# Altium PCB PCB1.PcbDoc
Units mm, origin at the board's own origin, x right, y up, seen from the top; angles counter-clockwise.
Board outline 84.5 x 47.9 mm, 2 copper layers (Top Layer, Bottom Layer); 41 components, 29 nets, 133 pads, 0 vias.
Unrouted connection lines stored in the file: 7.
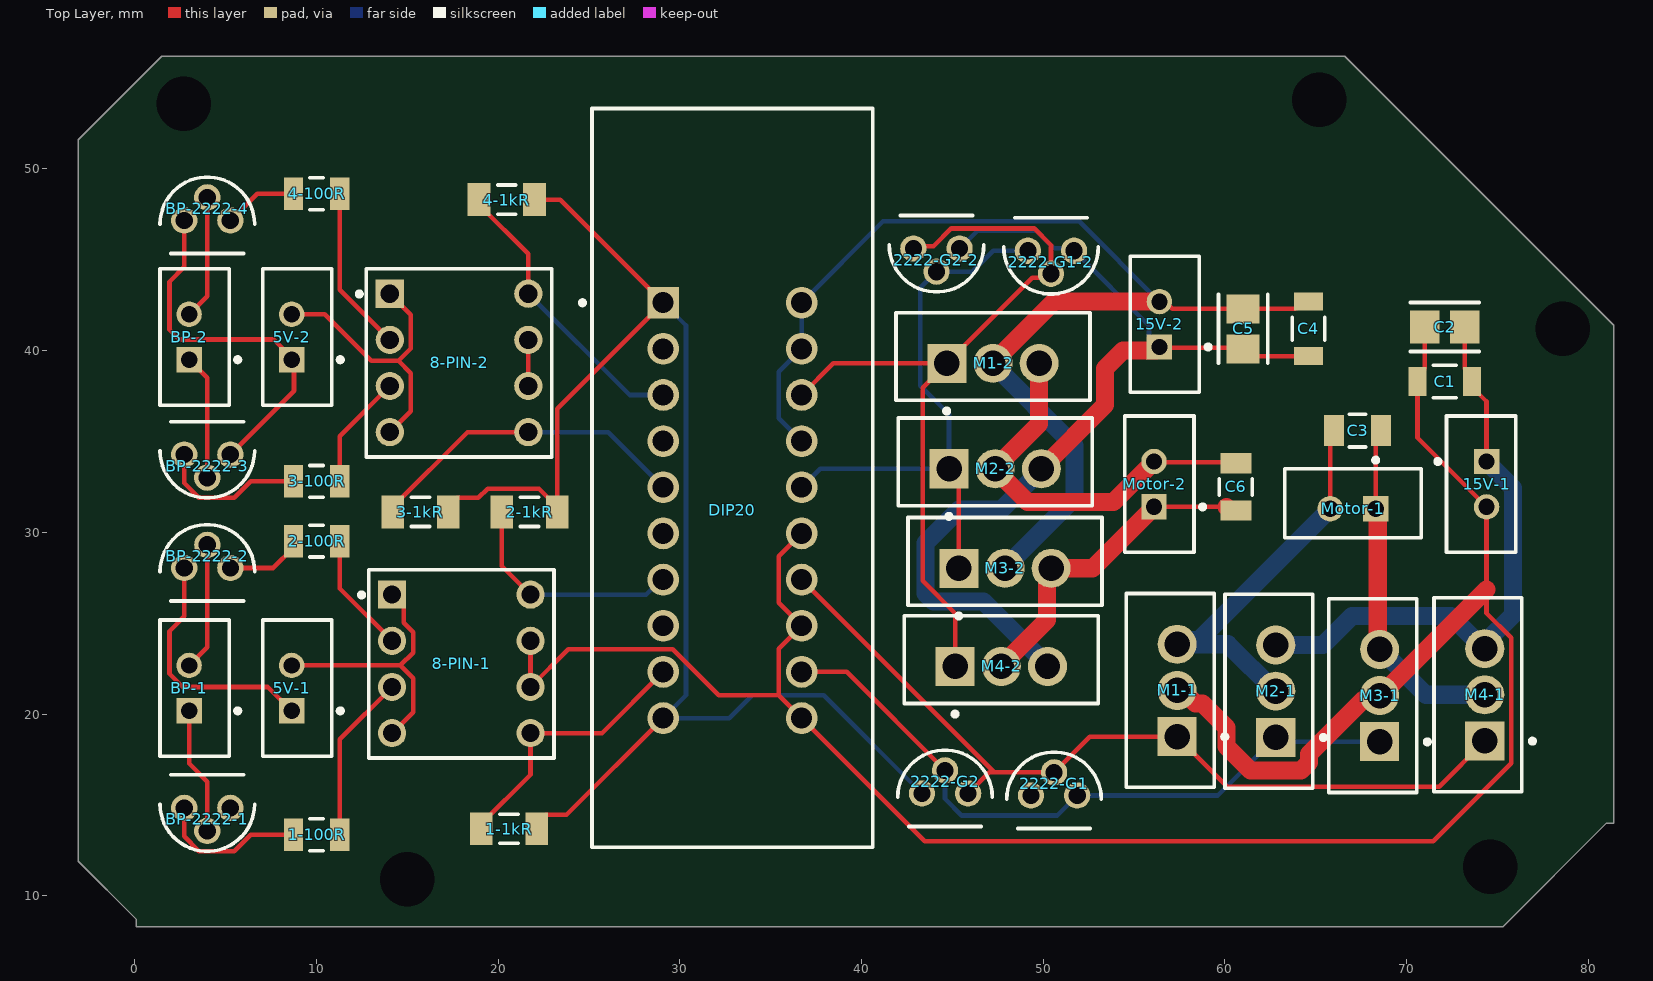
[diagram p0: Top Layer view]
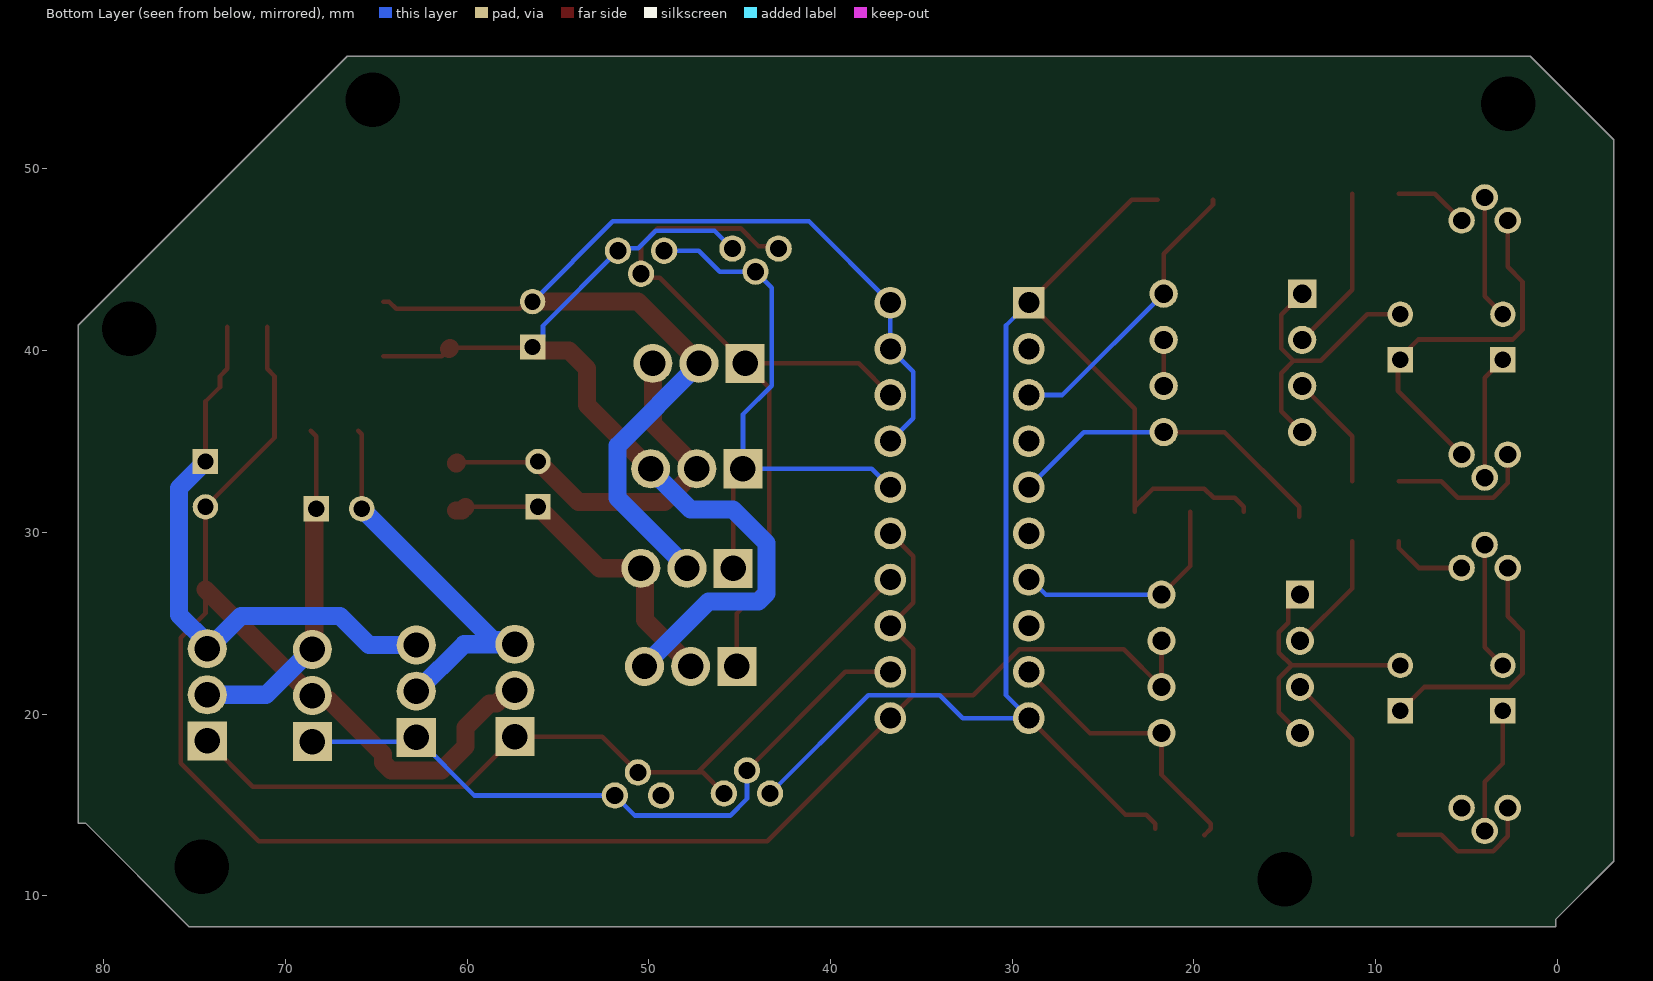
[diagram p1: Bottom Layer view, seen from below]
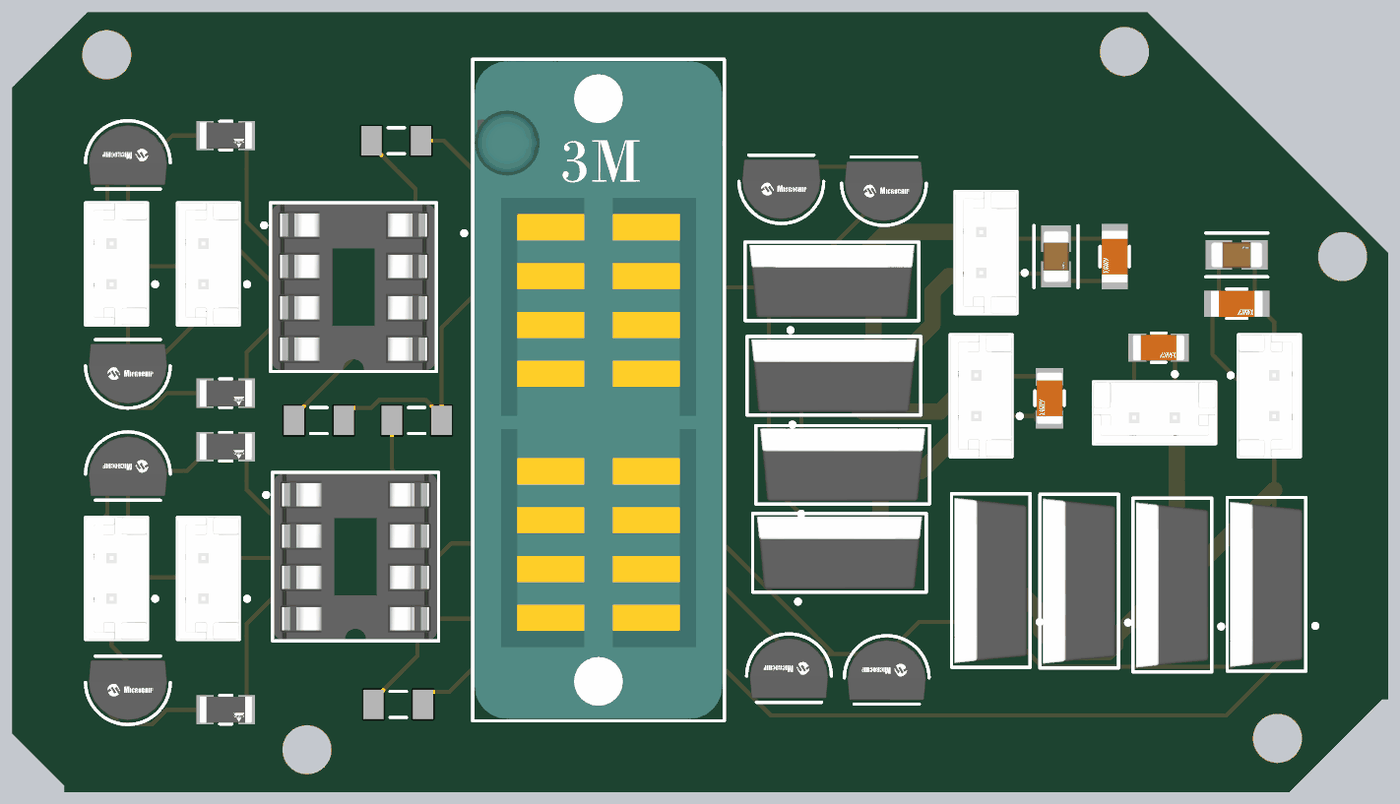
[diagram p2: 3D render of the assembled board from above, using the file's embedded part models]

## Layer stack, top to bottom
Top Solder: solder mask 0.0102, Solder Resist, Dk 3.5
Top Layer: signal copper 0.0356
Dielectric 1: dielectric 0.32, FR-4, Dk 4.8
Bottom Layer: signal copper 0.0356
Bottom Solder: solder mask 0.0102, Solder Resist, Dk 3.5

## Board outline
1.5,56.2 -3.1,51.6 -3.1,11.9 0.1,8.7 0.1,8.3 75.3,8.3 81,14 81.4,14 81.4,41.4 66.6,56.2 65.6,56.2

## Design rules (kind name [scope] priority, off if disabled: settings)
Clearance [All] p1: gap=0.254 ignorepadtopadclearanceinfootprint=FALSE except(0: Arc-Hole Track-Hole SMDPad-Hole THPad-Hole Via-Hole Fill-Hole Poly-Hole Region-Hole Text-Hole)
PolygonConnect [All] p1: connectstyle=Relief reliefconductorwidth=0.254 reliefentries=4 polygonreliefangle="90 Angle" airgapwidth=0.254
RoutingVias [All] p1: holewidth=0.711 width=1.27 viastyle="Through Hole" minholewidth=0.711 minwidth=1.27 maxholewidth=0.711 maxwidth=1.27
SolderMaskExpansion [All] p1: expansion=0.102 istentingtop=FALSE
Width [All] p1: maxlimit=1 minlimit=0.254 preferedwidth=0.254
30 further rules are at their usual default settings.

## Components (designator, comment, footprint, x,y, rotation, side; value= is the part's Value field where it differs from the comment)
1-1kR "1k" RESC3116X65X40ML10T20 20.604,13.686 r180 top
1-100R "100" FP-CRCW1206-e3-MFG 10.014,13.361 r0 top
2-1kR "1k" RESC3116X65X40ML10T20 21.736,31.125 r0 top
2-100R "100" FP-CRCW1206-e3-MFG 10.014,29.516 r0 top
3-1kR "1k" RESC3116X65X40ML10T20 15.73,31.125 r180 top
3-100R "100" FP-CRCW1206-e3-MFG 10.014,32.804 r0 top
4-1kR "1k" RESC3116X65X40ML10T20 20.481,48.313 r0 top
4-100R "100" FP-CRCW1206-e3-MFG 10.014,48.638 r0 top
5V-1 "" FP-B2B-EH-A_LF_SN-MFG 8.944,21.426 r90 top
5V-2 "" FP-B2B-EH-A_LF_SN-MFG 8.944,40.75 r90 top
8-PIN-1 "8-pin IC 1" FP-1-2199298-2-MFG 17.979,22.761 r270 top
8-PIN-2 "8-pin IC 1" FP-1-2199298-2-MFG 17.856,39.324 r270 top
15V-1 "15V-1" FP-B2B-EH-A_LF_SN-MFG 74.1,32.65 r270 top
15V-2 "15V-2" FP-B2B-EH-A_LF_SN-MFG 56.7,41.45 r90 top
2222-G1 "VN2222LL-G" FP-VN2222LL-G-MFG 50.6,15.8 r180 top
2222-G1-2 "VN2222LL-G" FP-VN2222LL-G-MFG 50.43,45.221 r0 top
2222-G2 "VN2222LL-G" FP-VN2222LL-G-MFG 44.6,15.909 r180 top
2222-G2-2 "VN2222LL-G" FP-VN2222LL-G-MFG 44.13,45.339 r0 top
BP-1 "" FP-B2B-EH-A_LF_SN-MFG 3.3,21.426 r90 top
BP-2 "" FP-B2B-EH-A_LF_SN-MFG 3.3,40.75 r90 top
BP-2222-1 "VN2222LL-G" FP-VN2222LL-G-MFG 4,14.556 r0 top
BP-2222-2 "VN2222LL-G" FP-VN2222LL-G-MFG 4.003,28.321 r180 top
BP-2222-3 "VN2222LL-G" FP-VN2222LL-G-MFG 4,34 r0 top
BP-2222-4 "VN2222LL-G" FP-VN2222LL-G-MFG 4,47.442 r180 top
C1 "100pF" FP-1206-L_3_2_0_2-W_1_6_0-MFG 72.1,38.3 r0 top
C2 "100uF" FP-C3216-160-0_3-IPC_C 72.099,41.3 r0 top
C3 "100nF" FP-1206-L_3_2_0_2-W_1_6_0-IPC_C 67.301,35.6 r0 top
C4 "100pF" FP-1206-L_3_2_0_2-W_1_6_0-MFG 64.6,41.2 r270 top
C5 "100uF" FP-C3216-160-0_3-IPC_C 61,41.2 r270 top
C6 "100nF" FP-1206-L_3_2_0_2-W_1_6_0-IPC_C 60.6,32.5 r270 top
DIP20 "220-3342-00-0602J" FP-220-3342-00-0602J-0 32.9,33 r90 top
M1-1 "IRFZ44ZLPBF" FP-PG-TO262-3-MFG 56.995,21.3 r180 top
M1-2 "IRFZ44ZLPBF" FP-PG-TO262-3-MFG 47.24,39.678 r90 top
M2-1 "IRFZ44ZLPBF" FP-PG-TO262-3-MFG 62.423,21.26 r180 top
M2-2 "IRFZ44ZLPBF" FP-PG-TO262-3-MFG 47.36,33.877 r90 top
M3-1 "IRFZ44ZLPBF" FP-PG-TO262-3-MFG 68.141,21.019 r180 top
M3-2 "IRFZ44ZLPBF" FP-PG-TO262-3-MFG 47.9,28.4 r90 top
M4-1 "IRFZ44ZLPBF" FP-PG-TO262-3-MFG 73.923,21.06 r180 top
M4-2 "IRFZ44ZLPBF" FP-PG-TO262-3-MFG 47.7,23 r90 top
Motor-1 "header thing" FP-B2B-EH-A_LF_SN-MFG 67.05,31.6 r180 top
Motor-2 "header thing" FP-B2B-EH-A_LF_SN-MFG 56.4,32.65 r90 top

## Footprints (in the part's own frame and the unit in brackets; to place one, negate y for a bottom-side part, rotate by r counter-clockwise, add the part's x,y. Pads: shape width x height; smd on the part's side, far side on the other; paste and mask are expansions set on the pad)
FP-1-2199298-2-MFG [mm]
  rect 1.55x1.55 hole 1 paste-1000 mask+0: 1(-3.81,-3.81)
  round 1.55 hole 1 paste-1000 mask+0: 2(-1.27,-3.81) 3(1.27,-3.81) 4(3.81,-3.81) 5(3.81,3.81) 6(1.27,3.81) 7(-1.27,3.81) 8(-3.81,3.81)
  silkscreen extent -5.18,-5.61 5.18,5.1, body extent -5.28,-5.2 5.28,5.2, height 0.25
FP-220-3342-00-0602J-0 [mm]
  rect 1.75x1.75 hole 1.15 paste-1000 mask+0: 1(9.64,3.81)
  round 1.75 hole 1.15 paste-1000 mask+0: 2(7.1,3.81) 3(4.56,3.81) 4(2.02,3.81) 5(-0.52,3.81) 6(-3.06,3.81) 7(-5.6,3.81) 8(-8.14,3.81) 9(-10.68,3.81) 10(-13.22,3.81) 11(-13.22,-3.81) 12(-10.68,-3.81) 13(-8.14,-3.81) 14(-5.6,-3.81) 15(-3.06,-3.81) 16(-0.52,-3.81) 17(2.02,-3.81) 18(4.56,-3.81) 19(7.1,-3.81) 20(9.64,-3.81)
  silkscreen extent -20.33,-7.73 20.33,8.37, body extent -20.43,-7.83 32.97,7.83, height 0.25
FP-1206-L_3_2_0_2-W_1_6_0-IPC_C [mm]
  rect 1.105x1.706 smd paste+0 mask+0: 1(-1.301,0) 2(1.301,0)
  silkscreen extent -0.45,-0.9 0.45,0.9, body extent -1.95,-1 1.95,1, height 0.25
FP-1206-L_3_2_0_2-W_1_6_0-MFG [mm]
  rect 1x1.6 smd paste+0 mask+0: 1(-1.5,0) 2(1.5,0)
  silkscreen extent -0.63,-0.9 0.63,0.9, body extent -2.1,-1 2.1,1, height 0.25
FP-B2B-EH-A_LF_SN-MFG [mm]
  rect 1.4x1.4 hole 0.9 paste-1000 mask+0: 1(-1.25,0.3)
  round 1.4 hole 0.9 paste-1000 mask+0: 2(1.25,0.3)
  silkscreen extent -3.75,-2.5 3.75,1.9, body extent -3.85,-2 3.85,2, height 0.25
FP-C3216-160-0_3-IPC_C [mm]
  rect 1.604x1.806 smd paste+0 mask+0: 1(-1.101,0) 2(1.101,0)
  silkscreen extent -1.9,-1.35 1.9,1.35, body extent -2,-1.05 2,1.05, height 0.25
FP-CRCW1206-e3-MFG [mm]
  rect 1.05x1.8 smd paste+0 mask+0: 1(-1.275,0) 2(1.275,0)
  silkscreen extent -0.38,-0.87 0.38,0.87, body extent -1.9,-1 1.9,1, height 0.25
FP-PG-TO262-3-MFG [mm]
  rect 2.15x2.15 hole 1.4 paste-1000 mask+0: 1(-0.377,2.54)
  round 2.15 hole 1.4 paste-1000 mask+0: 2(-0.377,0) 3(-0.377,-2.54)
  silkscreen extent -3.13,-5.34 2.41,5.34, body extent -2.51,-5.44 2.51,5.44, height 0.25
FP-VN2222LL-G-MFG [mm]
  round 1.45 hole 0.95 paste-1000 mask+0: 1(1.27,0.279) 2(0,-0.991) 3(-1.27,0.279)
  silkscreen extent -2.6,-2.1 2.6,2.1, body extent -2.7,-2.2 2.7,2.2, height 0.25
RESC3116X65X40ML10T20 [mm] "Chip Resistor, 2-Leads, Body 3.10x1.60mm, IPC Low Density"
  rect 1.25x1.8 smd: 1(-1.525,0) 2(1.525,0)
  silkscreen extent -0.5,-0.8 0.5,0.8, body extent -1.6,-0.85 1.6,0.85, height 0.65

## Part data
1-1kR 2-1kR 3-1kR 4-1kR: library part CMP-2100-03678-1, "Chip Resistor, 1 KOhm, +/- 1%, 0.25 W, -55 to 155 degC, 1206 (3216 Metric), RoHS, Tape and Reel", Case Code (Imperial)=1206, Case Code (Metric)=3216, Manufacturer=Yageo, Max Operating Temperature=155degC, Min Operating Temperature=-55degC, Package Description="2-Pin Surface Mount Device, Body 3.1 x 1.6 mm", Package Reference=1206.0, Power Rating=250mW, Resistance=1KOhm, Temperature Coefficient=100ppm/degreesC, Tolerance=1%, Voltage Rating=200V, Case/Package=1206, Composition=ThickFilm, Datasheet URL=http://www.yageo.com/NewPortal/yageodocoutput?fileName=/pdf/R-Chip/PYu-RC_Group_51_RoHS_L_5.pdf, Datasheet Version="Rev. 5, 10/2016", Depth=1.6mm, Height=0.55mm, Lead Free=LeadFree, Length=3.1mm, Manufacturer URL=http://www.yageo.com/, Military Standard=Not, Packaging=TapeandReel, REACH SVHC=Unknown, RoHSCompliant=true, Termination=SMD/SMT
1-100R 2-100R 3-100R 4-100R: library part CMP-2003-04801-2, "RES Thick Film, 100Ω, 1%, 0.25W, 100ppm/°C, 1206", Case Code (Imperial)=1206, Case Code (Metric)=3216, Max Operating Temperature=155°C, Min Operating Temperature=-55°C, Package Quantity=5000, Power Rating=250mW, Resistance=100R, Temperature Coefficient=100ppm/°C, Tolerance=1%, Voltage Rating=200V, Case/Package=1206, Composition="Thick Film", Contact Plating=Tin, Depth=1.6mm, Height=0.55mm, Lead Free="Lead Free", Length=3.2mm, Military Standard=Not, Mount="Surface Mount", Number of Pins=2, Packaging="Tape and Reel", Radiation Hardening=No, Termination=SMD/SMT, Voltage Rating (DC)=200V, Weight=0.000353oz, Width=1.6mm
5V-1 5V-2 15V-1 15V-2 BP-1 BP-2 Motor-1 Motor-2: library part CMP-17439-000026-1, "CONN HEADER VERT 2POS 2.5MM", Color=Natural, Contact Resistance=20mR, Current Rating=3A, Housing Color=White, Max Operating Temperature=85°C, Max Voltage Rating (AC)=250V, Min Operating Temperature=-25°C, Connector Type=Plug, Contact Material="Copper Alloy", Contact Mating Length=0.13inch, Contact Plating=Tin, Contact Type="Male Pin", Depth=3.8mm, Fastening Type=Detent, Gender=Male, Housing Material=Nylon, Lead Free="Lead Free", Length=7.5mm, Max Current Rating=3A, Mount="Through Hole", Number of Contacts=2, Number of Positions=2, Number of Rows=1, Orientation=Straight, Packaging=Bulk, Pitch=2.5mm, Series=EH, Termination=Press-Fit, Voltage Rating=250V
8-PIN-1 8-PIN-2: library part CMP-03370-000009-1, "CONN IC DIP SOCKET 8POS TIN", Color=Black, Contact Current Rating=1A, Contact Resistance=20mR, Flammability Rating="UL94 V-0", Insulation Resistance=1GR, Max Operating Temperature=105°C, Min Operating Temperature=-40°C, Package Quantity=60, Connector Type=Pin, Contact Finish - Mating=TIN, Contact Material=Bronze, Contact Plating=Tin, Contact Post Length=3inch, ELV=Compliant, Housing Material=PBT, Lead Free="Lead Free", Lead Pitch=2.54mm, Length=0.4inch, Mating Alignment="Yes (With)", Mount="Through Hole", Number of Contacts=8, Number of Positions=8, Number of Rows=2, Orientation=Straight, Packaging=Rail/Tube, Pitch=2.54mm, Radiation Hardening=No, RoHS Compliant=Yes, Row Spacing=0.3inch, Series="Diplomate DL", Termination="Through Hole"
2222-G1 2222-G1-2 2222-G2 2222-G2-2 BP-2222-1 BP-2222-2 BP-2222-3 BP-2222-4: library part CMP-06369-000005-1, "MOSFET N-CH 60V 0.23A TO92-3", Case/Package=TO-92, Continuous Drain Current (ID)=230mA, Drain to Source Breakdown Voltage=60V, Drain to Source Resistance=7.5R, Gate to Source Voltage (Vgs)=30V, Max Operating Temperature=150°C, Min Operating Temperature=-55°C, Package Quantity=1000, Power Dissipation=1W, Element Configuration=Single, Lead Free="Lead Free", Mount="Through Hole", Number of Elements=1, Number of Pins=3, Packaging=Bulk, Radiation Hardening=No
C1 C4: library part CMP-04427-007664-1, "General Purpose Ceramic Capacitor, 1206, 100pF, 5%, NP0, 30ppm/°C, 100V", Case Code (Imperial)=1206, Case Code (Metric)=3216, Dielectric=C0G, Insulation Resistance=100GR, Max Operating Temperature=125°C, Min Operating Temperature=-55°C, Package Quantity=1, Temperature Coefficient=30ppm/°C, Tolerance=5%, Voltage=63V, Voltage Rating=100V, Capacitance=100pF, Case/Package=1206, Construction=Flat, Contact Plating=Tin, Depth=1.6mm, Height=0.94mm, Lead Free="Lead Free", Length=3.2mm, Mount="Surface Mount", Number of Pins=2, Packaging="Tape and Reel", Radiation Hardening=No, REACH SVHC="No SVHC", RoHS Compliant=Yes, Series=-, Termination=SMD/SMT, Thickness=0.037inch, Voltage Rating (DC)=100V, Width=0.063inch
C2 C5: library part CMP-2000-05396-3, "Multilayer Ceramic Capacitors 100uF ±20% 10V X5R SMD 1206", Case Code (Imperial)=1206, Case Code (Metric)=3216, Dielectric=X5R, Dielectric Material=Ceramic, Max Operating Temperature=85°C, Min Operating Temperature=-55°C, Package Quantity=1, Tolerance=20%, Voltage=10V, Capacitance=100uF, Case/Package=1206, Construction=Flat, Depth=1.6mm, Height=1.6mm, Lead Free="Lead Free", Length=3.2mm, Mount="Surface Mount", Packaging="Tape and Reel", Radiation Hardening=No, REACH SVHC="No SVHC", Resistor Type=Ceramic, RoHS Compliant=Yes, Series=C, Termination=SMD/SMT, Thickness=0.075inch, Voltage Rating=10V, Voltage Rating (DC)=10V, Weight=0.000571oz, Width=1.6mm
C3 C6: library part CMP-04427-013576-1, "General Purpose Ceramic Capacitor, 1206, 100nF, 5%, X7R, 15%, 100V", Case Code (Imperial)=1206, Case Code (Metric)=3216, Dielectric=X7R, Dielectric Material=Ceramic, Max Operating Temperature=125°C, Min Operating Temperature=-55°C, Package Quantity=1, Tolerance=5%, Voltage=100V, Capacitance=100nF, Case/Package=1206, Construction=Flat, Contact Plating=Tin, Depth=1.6mm, Height=1.27mm, Lead Free="Lead Free", Length=3.2mm, Mount="Surface Mount", Number of Pins=2, Packaging="Tape and Reel", Radiation Hardening=No, REACH SVHC="No SVHC", RoHS Compliant=Yes, Series=-, Termination=SMD/SMT, Thickness=0.05inch, Voltage Rating=100V, Voltage Rating (DC)=100V, Width=0.063inch
DIP20: library part CMP-05380-000001-1, "CONN IC DIP SOCKET ZIF 20POS GLD", Current Rating=1A, Manufacturer=3M, Package=0, Socket Package=DIP20, Temperature="-55°C to +125°C", Temperature Range High=+125°C, Temperature Range Low=-55°C, Automotive=No, Category=Conn, ComponentLink2Description=Datasheet, ComponentLink2URL=https://multimedia.3m.com/mws/media/494546O/3mtm-dip-sockets-100-2-54-mm-ts0365.pdf, Conn Gender=Female, Conn Orientation=Vertical, Contact Material=Gold,Nickel, Device Class L1=Connectors, Device Class L2="IC and Component Sockets", Device Class L3=unset, Digikey Description="CONN IC DIP SOCKET ZIF 20POS GLD", Height=24mm, Is Female=yes, Lead Free=Yes, Manufacturer Part Number=220-3342-00-0602J, Mouser Description="IC & Component Sockets 0.100 DIP SOCKET 20 Contact Qty.", Number of Contacts=20, Number of Rows=2, Octopart=https://octopart.com/220-3342-00-0602j-3m-108647, Pitch=2.54mm, RoHS=TRUE, Standoff Height=0.38mm
M1-1 M1-2 M2-1 M2-2 M3-1 M3-2 M4-1 M4-2: library part CMP-32901-000428-1, "MOSFET N-CH 55V 51A TO262", Case/Package=TO-262, Continuous Drain Current (ID)=51A, Drain to Source Resistance=13.9mR, Drain to Source Voltage (Vdss)=55V, Gate to Source Voltage (Vgs)=20V, Input Capacitance=1.42nF, Max Operating Temperature=175°C, Max Power Dissipation=80W, Min Operating Temperature=-55°C, Element Configuration=Single, Halogen Free="Halogen Free", Height=0.355inch, Lead Free="Contains Lead", Length=0.419inch, Max Dual Supply Voltage=55V, Mount="Through Hole", Number of Pins=3, Packaging=Rail/Tube, Power Dissipation=80W, Rds On Max=13.9mR, RoHS Compliant=Yes, Turn-Off Delay Time=33ns, Turn-On Delay Time=14ns, Width=0.19inch

## Free pads (board coordinates)
  round 1.524 hole 3: 2(65.2,53.8) 3(78.6,41.2) 4(74.6,11.6) 5(2.7,53.6) 6(15,10.9)

## Nets (pads, with @x,y where several pads share a name; then routed paths per layer and width w, separated by ;. In a path a pad name is that pad's centre, name@x,y a point inside that pad or via, vN(x,y) a via of type N, cw(c..) or ccw(c..) an arc to the next point about the centre after c; other vN are vias at no path point)
G1: 2222-G1-2.2 2222-G2-2.3 DIP20.18 M1-2.1 M4-2.1 | length 44.4
  Top Layer w0.254: DIP20.18 38.45,39.3 M1-2.1 ; 2222-G2-2.3 42.99,45.748 43.966,45.748 44.942,46.724 49.5,46.724 50.43,45.794 2222-G1-2.2 50.201,44.001 49.401,44.001 M1-2.1 ; M4-2.1 45.16,25.534 43.364,27.33 43.364,37.964 M1-2.1
G2: 2222-G1-2.3 2222-G2-2.2 DIP20.16 M2-2.1 M3-2.1 | length 31.6
  Top Layer w0.254: M2-2.1 45.36,32.96 M3-2.1
  Bottom Layer w0.254: DIP20.16 37.73,33.5 M2-2.1 44.82,36.491 43.244,38.067 43.244,43.462 2222-G2-2.2 46.102,44.348 47.253,45.5 2222-G1-2.3
G3: 2222-G1.2 2222-G2.3 DIP20.14 M1-1.1 M4-1.1 | length 46.9
  Top Layer w0.254: DIP20.14 47.319,16.791 ; 2222-G2.3 47.031,16.791 47.319,16.791 ; M4-1.1 71.79,16.01 60.122,16.01 M1-1.1 52.569,18.76 2222-G1.2 47.319,16.791
G4: 2222-G1.3 2222-G2.2 DIP20.12 M2-1.1 M3-1.1 | length 37.9
  Top Layer w0.254: DIP20.12 39.18,22.32 2222-G2.2
  Bottom Layer w0.254: 2222-G2.2 44.6,15.336 45.521,14.415 50.764,14.415 2222-G1.3 59.601,15.521 M2-1.1 63.041,18.479 M3-1.1
GND: 1-1kR.1 2-1kR.2 3-1kR.1 4-1kR.2 5V-1.1 5V-2.1 15V-1.1 15V-2.1 2222-G1-2.1 2222-G1.1 2222-G2-2.1 2222-G2.1 BP-2222-1.1 BP-2222-2.1 BP-2222-3.1 BP-2222-4.1 C1.2 C2.2 C4.2 C5.2 DIP20.1 DIP20.10 M2-1.3 M2-2.3 M4-1.3 M4-2.3 | length 200.2
  Top Layer w0.254: BP-2222-2.1 2.733,25.38 1.919,24.566 1.919,22.228 2.659,21.489 7.332,21.489 5V-1.1 ; BP-2222-4.1@2.743,47.181 2.743,44.617 1.919,43.793 1.919,41.149 2.457,40.611 7.664,40.611 8.775,39.5 8.775,37.785 BP-2222-3.1 ; 3-1kR.1 17.255,31.4 17.753,31.898 18.92,31.898 19.428,32.406 22.255,32.406 2-1kR.2@23.261,31.4 ; 4-1kR.2 23.417,48.313 DIP20.1 23.261,36.811 2-1kR.2@23.261,31.4 ; 1-1kR.1 22.129,13.961 22.627,14.459 23.769,14.459 DIP20.10 ; 2-1kR.2 2-1kR.2@23.261,31.4 ; 15V-2.1@56.451,40.149 C5.2@60.949,40.149 ; C5.2 61.399,39.7 C4.2 ; C2.2 73.2,39 73.6,38.6 C1.2 73.6,38 74.4,37.2 15V-1.1
  Top Layer w1: M2-2.3 53.41,37.01 53.41,39.01 54.4,40 56.2,40 15V-2.1 15V-2.1@56.451,40.149 ; C5.2@60.949,40.149 C5.2
  Bottom Layer w0.254: DIP20.1 30.346,41.384 30.346,21.036 DIP20.10 32.735,19.78 33.991,21.036 37.924,21.036 2222-G2.1 ; 2222-G2-2.1 46.388,46.606 49.618,46.606 50.594,45.63 51.57,45.63 2222-G1-2.1 55.827,41.373 55.827,40.773 15V-2.1
  Bottom Layer w1: M2-2.3 49.9,33.453 47.702,31.255 45.377,31.255 43.531,29.41 43.531,26.635 43.973,26.193 46.716,26.193 50.24,22.669 M4-2.3 ; M2-1.3 65.399,23.8 66.988,25.388 72.447,25.388 74.235,23.6 M4-1.3 74.3,23.911 75.854,25.465 75.854,32.446 15V-1.1
IN1: 3-1kR.2 8-PIN-2.5 DIP20.5 | length 18.4
  Top Layer w0.254: 3-1kR.2@14.205,30.85 3-1kR.2 14.205,31.4 18.319,35.514 8-PIN-2.5
  Bottom Layer w0.254: 8-PIN-2.5 26.056,35.514 DIP20.5
IN2: 4-1kR.1 8-PIN-2.8 DIP20.3 | length 16
  Top Layer w0.254: 4-1kR.1 18.956,48.038 21.666,45.328 8-PIN-2.8
  Bottom Layer w0.254: 8-PIN-2.8 27.24,37.56 DIP20.3
IN3: 1-1kR.2 8-PIN-1.5 DIP20.9 | length 15.6
  Top Layer w0.254: 1-1kR.2@19.419,13.346 1-1kR.2 19.079,13.961 21.789,16.671 8-PIN-1.5 25.721,18.951 DIP20.9
IN4: 2-1kR.1 8-PIN-1.8 DIP20.7 | length 12.9
  Top Layer w0.254: 2-1kR.1 20.211,28.15 8-PIN-1.8
  Bottom Layer w0.254: 8-PIN-1.8 28.143,26.571 28.972,27.4 DIP20.7
Net1-100R_1: 1-100R.1 BP-2222-1.3 | length 8.3
  Top Layer w0.254: BP-2222-1.3 2.73,13.272 3.542,12.46 5.491,12.46 6.392,13.361 1-100R.1
Net1-100R_2: 1-100R.2 8-PIN-1.3 | length 9.3
  Top Layer w0.254: 1-100R.2 11.289,18.61 8-PIN-1.3
Net2-100R_1: 2-100R.1 BP-2222-2.3 | length 4.3
  Top Layer w0.254: BP-2222-2.3 7.639,28.041 8.739,29.141 2-100R.1
Net2-100R_2: 2-100R.2 8-PIN-1.2 | length 6.7
  Top Layer w0.254: 2-100R.2 11.289,26.912 8-PIN-1.2
Net3-100R_1: 3-100R.1 BP-2222-3.3 | length 8.3
  Top Layer w0.254: BP-2222-3.3 2.73,32.715 3.542,31.903 5.491,31.903 6.392,32.804 3-100R.1
Net3-100R_2: 3-100R.2 8-PIN-2.3 | length 6.4
  Top Layer w0.254: 3-100R.2 11.289,35.297 8-PIN-2.3
Net4-100R_1: 4-100R.1 BP-2222-4.3 | length 4.1
  Top Layer w0.254: BP-2222-4.3 6.745,48.638 4-100R.1
Net4-100R_2: 4-100R.2 8-PIN-2.2 | length 9.2
  Top Layer w0.254: 4-100R.2 11.289,43.351 8-PIN-2.2
Net5V-1_2: 5V-1.2 8-PIN-1.1 8-PIN-1.4 | length 15.1
  Top Layer w0.254: 5V-1.2 14.619,22.676 ; 8-PIN-1.4 15.325,20.107 15.325,21.97 14.619,22.676 ; 8-PIN-1.1 14.817,25.923 14.817,25.018 15.325,24.51 15.325,23.382 14.619,22.676
Net5V-2_2: 5V-2.2 8-PIN-2.1 8-PIN-2.4 | length 16.1
  Top Layer w0.254: 5V-2.2 10.459,42 13.02,39.438 14.524,39.438 ; 8-PIN-2.4 15.202,36.67 15.202,38.761 14.524,39.438 ; 8-PIN-2.1 15.202,41.978 15.202,40.116 14.524,39.438
Net8-PIN-1_6: 8-PIN-1.6 8-PIN-1.7 15V-1.2 C1.1 C2.1 DIP20.11 DIP20.13 DIP20.15 M1-1.2 M3-1.2 | length 124.2
  Top Layer w0.254: 8-PIN-1.7 8-PIN-1.6 23.874,23.576 29.61,23.576 32.15,21.036 35.454,21.036 ; DIP20.15 35.454,28.684 35.454,26.116 DIP20.13 35.454,23.604 35.454,21.036 ; C2.1 70.998,38.998 70.6,38.6 C1.1 70.6,35.2 15V-1.2 74.4,26.854 74.4,25.559 75.756,24.203 75.756,17.287 71.469,13 43.49,13 DIP20.11 35.454,21.036
  Top Layer w1: M1-1.2 57.684,21.3 58.395,20.589 58.76,20.589 60.086,19.262 60.086,18.217 61.413,16.891 64.187,16.891 64.629,17.333 64.629,17.806 67.622,20.799 68.298,20.799 M3-1.2 68.565,21.019 74.4,26.854
Net8-PIN-2_6: 8-PIN-2.6 8-PIN-2.7 15V-2.2 C4.1 C5.1 DIP20.17 DIP20.19 DIP20.20 M1-2.2 M3-2.2 | length 68.4
  Top Layer w0.254: 8-PIN-2.6 8-PIN-2.7 ; 15V-2.2 56.71,42.7 57.109,42.301 C5.1 63.901,42.301 64.3,42.7 C4.1
  Top Layer w1: M1-2.2 47.24,39.347 50.593,42.7 15V-2.2
  Bottom Layer w0.254: DIP20.17 35.454,36.276 35.454,38.844 DIP20.19 DIP20.20 41.184,47.114 51.986,47.114 15V-2.2
  Bottom Layer w1: M1-2.2 47.24,39.253 51.729,34.764 51.729,31.898 47.9,28.069 M3-2.2
NetBP-1_1: BP-1.1 BP-2222-1.2 | length 7
  Top Layer w0.254: BP-1.1 3,17.279 4,16.279 BP-2222-1.2
NetBP-1_2: BP-1.2 BP-2222-2.2 | length 7.1
  Top Layer w0.254: BP-1.2 4.003,23.68 BP-2222-2.2
NetBP-2_1: BP-2.1 BP-2222-3.2 | length 6.9
  Top Layer w0.254: BP-2.1 4,38.5 BP-2222-3.2
NetBP-2_2: BP-2.2 BP-2222-4.2 | length 6.8
  Top Layer w0.254: BP-2.2 4,43 BP-2222-4.2
NetC3_1: C3.1 M1-1.3 M2-1.2 Motor-1.2 | length 22.4
  Top Layer w0.254: Motor-1.2 65.8,35.4 C3.1
  Bottom Layer w1: M2-1.2 62.753,21.26 60.174,23.84 M1-1.3 57.593,24.06 58.56,24.06 Motor-1.2
NetC3_2: C3.2 M3-1.3 M4-1.2 Motor-1.1 | length 19.1
  Top Layer w0.254: Motor-1.1 68.3,35.298 C3.2
  Top Layer w1: Motor-1.1 68.409,31.191 68.409,23.668 M3-1.3
  Bottom Layer w1: M3-1.3 68.565,23.559 71.064,21.06 M4-1.2
NetC6_1: C6.1 M1-2.3 M2-2.2 Motor-2.2 | length 21.8
  Top Layer w0.254: Motor-2.2@56.15,33.85 C6.1@60.55,33.85
  Top Layer w1: M1-2.3 49.78,35.967 47.36,33.547 M2-2.2 47.36,33.453 49.142,31.671 53.871,31.671 Motor-2.2 Motor-2.2@56.15,33.85 ; C6.1@60.55,33.85 C6.1
NetC6_2: C6.2 M3-2.3 M4-2.2 Motor-2.1 | length 18.2
  Top Layer w0.254: Motor-2.1 C6.2@60.098,31.4
  Top Layer w1: M4-2.2 47.7,22.669 50.22,25.189 50.22,27.802 M3-2.3 52.722,28.022 Motor-2.1 ; C6.2@60.098,31.4 60.299,31.199 C6.2
pads on no net: DIP20.2 DIP20.4 DIP20.6 DIP20.8